# Altium PCB ControleEsp32.PcbDoc
Units mil, origin at the board's own origin, x right, y up, seen from the top; angles counter-clockwise.
Board outline 3745 x 1435 mil, 2 copper layers (Top Layer, Bottom Layer); 46 components, 37 nets, 158 pads, 23 vias.
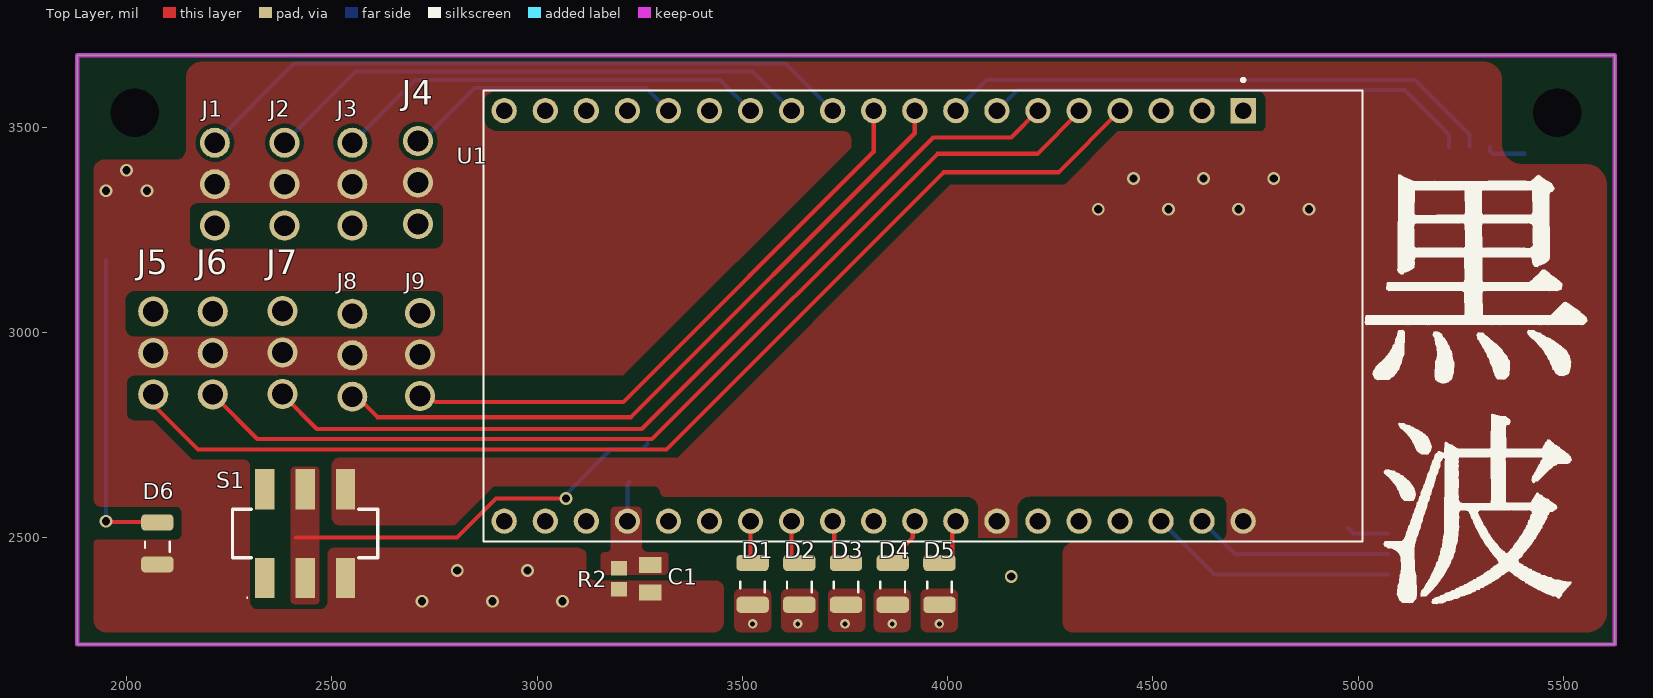
[diagram p0: Top Layer view]
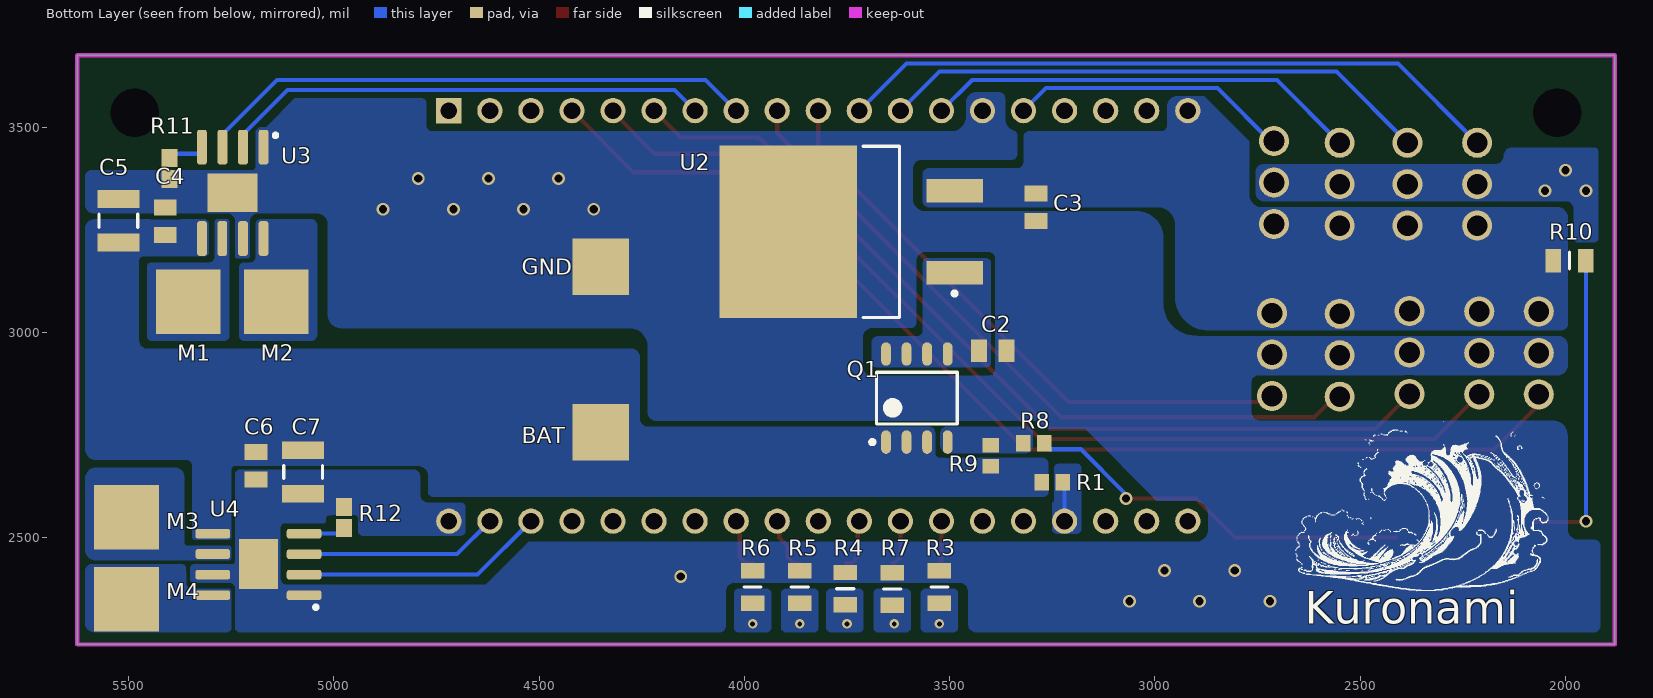
[diagram p1: Bottom Layer view, seen from below]
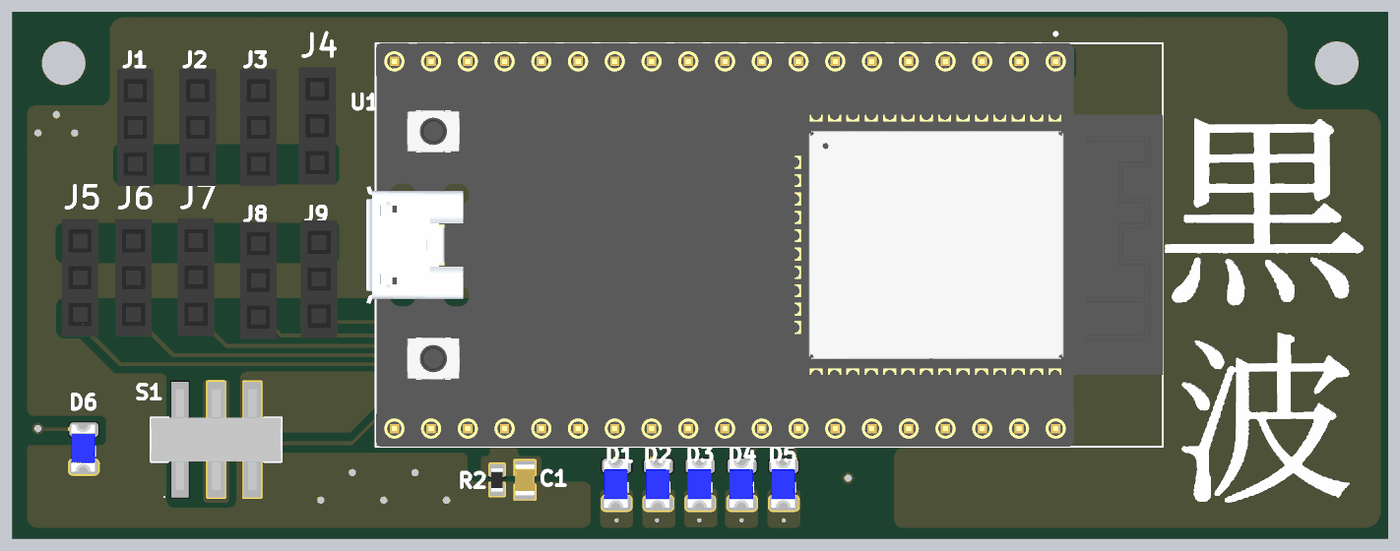
[diagram p2: 3D render of the assembled board from above, using the file's embedded part models]
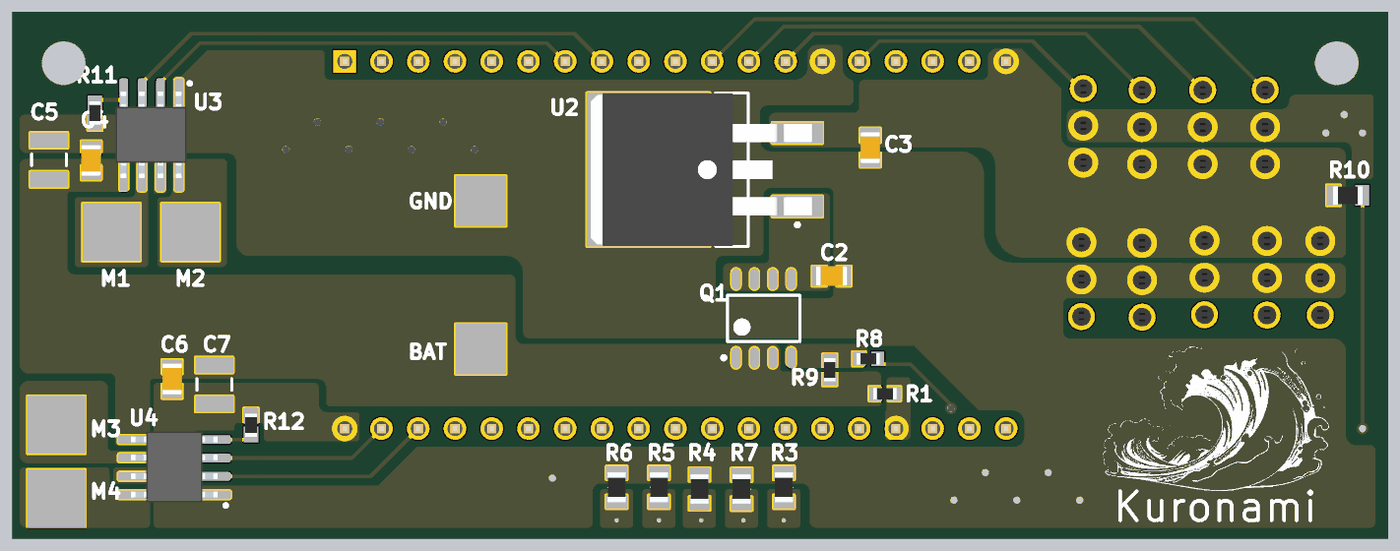
[diagram p3: 3D render of the assembled board from below, using the file's embedded part models]

## Layer stack, top to bottom
Top Solder: solder mask 0.4, Solder Resist, Dk 3.5
Top Layer: signal copper 1.4
Dielectric 1: dielectric 12.6, FR-4, Dk 4.8
Bottom Layer: signal copper 1.4
Bottom Solder: solder mask 0.4, Solder Resist, Dk 3.5

## Board outline
1880,2240 5625,2240 5625,3675 1880,3675

## Design rules (kind name [scope] priority, off if disabled: settings)
Clearance [All] p1: gap=10 ignorepadtopadclearanceinfootprint=FALSE except(0: Arc-Hole Track-Hole SMDPad-Hole THPad-Hole Via-Hole Fill-Hole Poly-Hole Region-Hole Text-Hole; 3.94: Arc-Arc Arc-Track Arc-SMDPad Track-Track Track-SMDPad SMDPad-SMDPad)
PolygonConnect [All] p1: connectstyle=Direct reliefconductorwidth=10 reliefentries=4 polygonreliefangle="90 Angle" airgapwidth=10
RoutingVias [All] p1: holewidth=28 width=50 viastyle="Through Hole" minholewidth=28 minwidth=50 maxholewidth=28 maxwidth=50
SolderMaskExpansion [All] p1: expansion=4 istentingtop=FALSE
Width [All] p1: maxlimit=10 minlimit=10 preferedwidth=10
30 further rules are at their usual default settings.

## Classes and differential pairs
component class Fonteslineares: BAT C2 C3 D6 GND Q1 R8 R9 R10 S1 U2
component class Driver2: C6 C7 M3 M4 R12 U4
component class Driver1: C4 C5 M1 M2 R11 U3
component class controleEsp32: C1 D1 D2 D3 D4 D5 J1 J2 J3 J4 J5 J6 J7 J8 J9 R1 R2 R3 R4 R5 R6 R7 U1

## Components (designator, comment, footprint, x,y, rotation, side; value= is the part's Value field where it differs from the comment)
BAT "Source Pad" PAD_ALIMENTAÇÃO_MINI 4350,2756.57 r180 bottom
C1 "100 nF" C0805 3275,2400 r90 top
C2 "0.33 uF" C0805 3395,2955 r0 bottom
C3 "0.1uF" C0805 3290,3305 r90 bottom
C4 "0.1uF" C0805 5410,3270.34 r270 bottom
C5 "47uF" C1210 5525,3271.85 r270 bottom
C6 "0.1uF" C0805 5190,2675 r90 bottom
C7 "47uF" C1210 5075,2660 r90 bottom
D1 "Blue" DIODO_2-SMD-3215 3525,2387.19 r90 top
D2 "Blue" DIODO_2-SMD-3215 3638.75,2387.19 r90 top
D3 "Blue" DIODO_2-SMD-3215 3752.5,2387.19 r90 top
D4 "Blue" DIODO_2-SMD-3215 3866.25,2387.19 r90 top
D5 "Blue" DIODO_2-SMD-3215 3980,2387.19 r90 top
D6 "Blue" DIODO_2-SMD-3215 2074.94,2485.71 r90 top
GND "Ground Pad" PAD_ALIMENTAÇÃO_MINI 4350,3160 r180 bottom
J1 "Female Header 3" "FEMALE HEADER 3" 2215,3260 r90 top
J2 "Female Header 3" "FEMALE HEADER 3" 2385,3260 r90 top
J3 "Female Header 3" "FEMALE HEADER 3" 2550,3260 r90 top
J4 "Female Header 3" "FEMALE HEADER 3" 2710,3264.02 r90 top
J5 "Female Header 3" "FEMALE HEADER 3" 2065,3050.98 r270 top
J6 "Female Header 3" "FEMALE HEADER 3" 2210,3050.98 r270 top
J7 "Female Header 3" "FEMALE HEADER 3" 2380,3051.97 r270 top
J8 "Female Header 3" "FEMALE HEADER 3" 2550,2843.34 r90 top
J9 "Female Header 3" "FEMALE HEADER 3" 2715,3046.97 r270 top
M1 "Motor Pad" PAD_MOTOR_MINI 5355,3075 r0 top
M2 "Motor Pad" PAD_MOTOR_MINI 5140,3075 r0 top
M3 "Motor Pad" PAD_MOTOR_MINI 5505,2550 r0 top
M4 "Motor Pad" PAD_MOTOR_MINI 5505,2350 r0 top
Q1 "FDS6576" SOIC-8 3580,2840 r90 bottom
R1 "10kR" RESISTOR_0603 3250,2635 r0 bottom
R2 "3.3kR" RESISTOR_0603 3199.81,2400 r90 top
R3 "1.5 kR" RESISTOR_0805 3525,2380 r90 bottom
R4 "1.5 kR" RESISTOR_0805 3754.39,2375.61 r90 bottom
R5 "1.5 kR" RESISTOR_0805 3865,2380 r90 bottom
R6 "1.5 kR" RESISTOR_0805 3980,2380 r90 bottom
R7 "1.5 kR" RESISTOR_0805 3640,2375 r90 bottom
R8 "10kR" RESISTOR_0603 3295,2730 r0 bottom
R9 "10kR" RESISTOR_0603 3400,2700 r90 bottom
R10 "750R" RESISTOR_0805 1990,3175 r0 bottom
R11 "30kOhms" RESC1608X55N 5400,3399.41 r270 bottom
R12 "30kOhms" RESC1608X55N 4975,2549.41 r90 bottom
S1 "JS202011SCQN" DPDT 2435,2510 r0 top
U1 "ESP32-DEVKITC-32D" MODULE_ESP32-DEVKITC-32D 3942.05,3040 r270 top
U2 "L7805CD2T-TR" D2PAK 3740,3245 r0 bottom
U3 "DRV8871DDA" SO-PowerPad-8(8_pins) 5247.08,3340 r270 bottom
U4 "DRV8871DDA" SO-PowerPad-8(8_pins) 5183.78,2435.59 r0 bottom

## Footprints (in the part's own frame and the unit in brackets; to place one, negate y for a bottom-side part, rotate by r counter-clockwise, add the part's x,y. Pads: shape width x height; smd on the part's side, far side on the other; paste and mask are expansions set on the pad)
C0805 [mm]
  rect 1x1.4 smd: 1(-0.85,-0.008) 2(0.85,-0.008)
  body extent -1.07,-0.68 1.07,0.67, height 0.9
C1210 [mm] "Chip Capacitor, Body 3.2x2.5mm, IPC High Density"
  rect 1.1x2.6 smd: 1(-1.35,0) 2(1.35,0)
  silkscreen extent -0.4,-1.2 0.4,1.2, body extent -1.7,-1.35 1.7,1.35, height 1.3
D2PAK [mm] "D2-PAK, 3-Pads, Body 7,60x8,64mm (max), IPC Medium Density"
  rect 3.5x1.45 smd: 1(-6.4,2.54) 3(-6.4,-2.54)
  rect 8.5x10.65 smd: 2(3.9,0)
  silkscreen extent -6.52,-5.3 -0.75,5.3, body extent -7.41,-5.28 7.89,5.28, height 4.81
DIODO_2-SMD-3215 [mm]
  rrect50% 1x2 smd: A(1.3,0) C(-1.288,-0.001)
  silkscreen extent -0.51,-0.76 0.13,0.76, body extent -1.61,-0.77 1.66,0.87, height 0.9
DPDT [mm]
  rect 1.2x2.5 smd: A1(0,-2.75) A1(0,2.75) A2(-2.5,-2.75) A2(-2.5,2.75) A3(2.5,-2.75) A3(2.5,2.75)
  silkscreen extent -4.5,-4 4.5,1.5, body extent -4.5,-3.5 4.5,3.5, height 5.65
"FEMALE HEADER 3" [mm]
  round 1.86 hole 1.28: PIN1(0,0) PIN2(2.565,0) PIN3(5.13,0)
  body extent -1.52,-1.27 6.6,1.27, height 8.5
MODULE_ESP32-DEVKITC-32D [mm]
  rect 1.56x1.56 / inner round 1.56 / far side rect 1.56x1.56 hole 1.04: J2-1(-12.7,19.76)
  round 1.56 hole 1.04: J2-2(-12.7,17.22) J2-3(-12.7,14.68) J2-4(-12.7,12.14) J2-5(-12.7,9.6) J2-6(-12.7,7.06) J2-7(-12.7,4.52) J2-8(-12.7,1.98) J2-9(-12.7,-0.56) J2-10(-12.7,-3.1) J2-11(-12.7,-5.64) J2-12(-12.7,-8.18) J2-13(-12.7,-10.72) J2-14(-12.7,-13.26) J2-15(-12.7,-15.8) J2-16(-12.7,-18.34) J2-17(-12.7,-20.88) J2-18(-12.7,-23.42) J2-19(-12.7,-25.96) J3-1(12.7,19.76) J3-2(12.7,17.22) J3-3(12.7,14.68) J3-4(12.7,12.14) J3-5(12.7,9.6) J3-6(12.7,7.06) J3-7(12.7,4.52) J3-8(12.7,1.98) J3-9(12.7,-0.56) J3-10(12.7,-3.1) J3-11(12.7,-5.64) J3-12(12.7,-8.18) J3-13(12.7,-10.72) J3-14(12.7,-13.26) J3-15(12.7,-15.8) J3-16(12.7,-18.34) J3-17(12.7,-20.88) J3-18(12.7,-23.42) J3-19(12.7,-25.96)
  silkscreen extent -14.7,-27.25 13.95,27.15, body extent -13.97,-27.9 13.97,27.2, height 6.69
PAD_ALIMENTAÇÃO_MINI [mm]
  rect 3.5x3.5 smd: A(0,0)
PAD_MOTOR_MINI [mm]
  rect 4x4 smd far side: M(0,0)
RESC1608X55N [mm]
  rect 1.1x1 smd: 1(-0.65,0) 2(0.65,0)
  body extent -0.8,-0.4 0.8,0.4, height 0.55
RESISTOR_0603 [mm]
  rect 0.9x1 smd: 1(-0.65,0) 2(0.65,0)
  body extent -0.8,-0.4 0.8,0.4, height 0.55
RESISTOR_0805 [mm]
  rect 0.95x1.45 smd: 1(-1,0) 2(1,0)
  silkscreen extent 0,-0.53 0,0.53, body extent -1.02,-0.63 1.02,0.63, height 0.5
SO-PowerPad-8(8_pins) [mm]
  rrect50% 2.15x0.6 smd: 1(-2.825,1.925) 2(-2.825,0.655) 3(-2.825,-0.615) 4(-2.825,-1.885) 5(2.825,-1.885) 6(2.825,-0.625) 7(2.825,0.65) 8(2.825,1.925)
  rect 2.4x3.1 smd: 9(0,0)
  silkscreen extent -3.66,2.57 -3.45,2.77, body extent -3,-2.45 3,2.45, height 1.7
SOIC-8 [mm] "SOIC, 8-Leads, Body 4,90x3,90mm, Pitch 1,27mm, IPC Medium Density"
  oval 1.45x0.6 smd: D(2.725,-1.905) D(2.725,-0.635) D(2.725,0.635) D(2.725,1.905) G(-2.725,-1.905) S(-2.725,-0.635) S(-2.725,0.635) S(-2.725,1.905)
  silkscreen extent -2.85,-2.5 1.6,2.88, body extent -2,-2.5 2,2.5, height 1.75

## Part data
BAT: library part "Source Pad Mini Sumô", "VCC PAD MINI SUMÔ", Cable AWG="20 / 18 (AWG)", Library Ref=Pads, Recomended Category="Mini Sumô", Size="3.5 x 3.5 (mm)"
C1: library part 885012207128, "CAP CER 100 nF 100V X7R 0805", Manufacturer="Wurth Elektronik", Operating Temperature="-55°C ~125ºC", Package / Case="0805(2012 Metric)", Supplier Part Number 1=710-885012207128, Tolerance=10%, Voltage - Rated="100 VDC", Category="Ceramic capacitor", ComponentLink1Description=Datasheet, ComponentLink1URL=https://br.mouser.com/datasheet/2/445/885012207128-1727772.pdf, ComponentLink2Description="Mouser Link", ComponentLink2URL=https://br.mouser.com/ProductDetail/Wurth-Elektronik/885012207128?qs=MLItCLRbWsys1TnbPEYt%252BQ%3D%3D, Dieletric=X7R, ESR=-, Library Control - Checked Footprint=Yes, Library Control - Checked Schematic=Yes, Library Ref=Capacitor, Part Number=885012207128, Price="1=0,41 10=0,283 100=0,169 1000=0,107 (USD)", Size / Dimension="2 mm L  x 1.25 mm W x 1.25 mm H", Supplier 1=Mouser
C2: library part GCM21BR71E334KA37K, "CAP CER 0.33UF 25V X7R 0805", Manufacturer="Murata Eletronics", Operating Temperature="-55 C ~ 125 C", Package / Case="0805 (2012 Metric)", Supplier Part Number 1=81-GCM21BR71E334KA7K, Tolerance=10%, Voltage - Rated="25 VDC", Category="Ceramic Capacitor", ComponentLink1Description=Datasheet, ComponentLink1URL=https://br.mouser.com/datasheet/2/281/GCM21BR71E334KA37_01-1968656.pdf, ComponentLink2Description="Mouser Link", ComponentLink2URL=https://br.mouser.com/ProductDetail/Murata-Electronics/GCM21BR71E334KA37K?qs=N3Kl9KD794Tg%2FXM5q2uFQQ%3D%3D, ComponentLink3Description=ESR, ComponentLink3URL=https://www.murata.com/en-us/products/productdetail?partno=GCM21BR71E334KA37%23, Dieletric=X7R, Library Control - Checked Footprint=Yes, Library Control - Checked Schematic=Yes, Library Control - Last Update="28/06/2021 00:57", Library Control - Person that Checked Footprint=Nikaum, Library Control - Person that Checked Schematic=Nikaum, Library Control - Person that did the Last Update Footprint=Nikaum, Library Control - Person that did the Last Update Schematic=Nikaum, Library Ref=Capacitor, Part Number=GCM21BR71E334KA37K, Price="1= 0,57, 10= 0,398, 100= 0,239 (USD)", Size / Dimension="2,00 L x 1,25 W x 1,25 H", Supplier 1=Mouser
C3: library part C0805C104M3RACTU, "CAP CER 0.1uF 25V X7R 0805", Manufacturer=Kemet, Operating Temperature="-55 C ~ 125 C", Package / Case="0805(2012 mestric)", Supplier Part Number 1=80-C0805C104M3R, Tolerance=20%, Voltage - Rated="25 VDC", Category="Ceramic Capacitor", ComponentLink1Description=Datasheet, ComponentLink1URL=https://br.mouser.com/datasheet/2/212/KEM_C1002_X7R_SMD-1102033.pdf, ComponentLink2Description="Mouser Link", ComponentLink2URL=https://br.mouser.com/ProductDetail/KEMET/C0805C104M3RACTU?qs=jbCUrP3sAgSIdMuvv9W4Pg%3D%3D, Dieletric=X7R, ESR=-, Library Control - Checked Footprint=No, Library Control - Checked Schematic=Yes, Library Control - Last Update="26/06/2021 20:52", Library Control - Person that Checked Schematic=Guilherme, Library Control - Person that did the Last Update Schematic=Marcos, Library Ref=Capacitor, Part Number=C0805C104M3RACTU, Price="1=0,13 10=0,064 100=0,037 1000=0,025 (USD)", Size / Dimension="1.25 mm W x 2 mm L x 0.78 mm H", Supplier 1=Mouser
C4 C6: library part C0805C104M3RACTU, "CAP CER 100nF 25V X7R 0805", Manufacturer=Kemet, Operating Temperature="-55 C ~ 125 C", Package / Case="0805(2012 mestric)", Supplier Part Number 1=80-C0805C104M3R, Tolerance=20%, Voltage - Rated="25 VDC", Category="Ceramic Capacitor", ComponentLink1Description=Datasheet, ComponentLink1URL=https://br.mouser.com/datasheet/2/212/KEM_C1002_X7R_SMD-1102033.pdf, ComponentLink2Description="Mouser Link", ComponentLink2URL=https://br.mouser.com/ProductDetail/KEMET/C0805C104M3RACTU?qs=jbCUrP3sAgSIdMuvv9W4Pg%3D%3D, Dieletric=X7R, ESR=-, Library Control - Checked Footprint=Yes, Library Control - Checked Schematic=Yes, Library Control - Last Update=25/08/22, Library Control - Person that Checked Footprint=Cage, Library Control - Person that Checked Schematic=Cage, Library Control - Person that did the Last Update Footprint=Cage, Library Control - Person that did the Last Update Schematic=Cage, Library Ref=Capacitor, Part Number=C0805C104M3RACTU, Price="1=0,13 10=0,064 100=0,037 1000=0,025 (USD)", Size / Dimension="1.25 mm W x 2 mm L x 0.78 mm H", Supplier 1=Mouser
C5 C7: library part GRM32EC81C476KE15K, "CAP CER 47uF 16V X6S 1210", Manufacturer=Murata, Operating Temperature="-55°C ~ 105°C", Package / Case="1210 (3225 metric)", Supplier Part Number 1=81-GRM32EC81C476KE5K, Tolerance=10%, Voltage - Rated=16V, Category="Ceramic Capacitor", ComponentLink1Description=Datasheet, ComponentLink1URL=https://br.mouser.com/datasheet/2/281/1/GRM32EC81C476KE15_01A-1988154.pdf, ComponentLink2Description="Mouser Link", ComponentLink2URL=https://br.mouser.com/ProductDetail/Murata-Electronics/GRM32EC81C476KE15K?qs=pba5EUA0Y0ZfNhWUOosFbg%3D%3D, Dieletric=X6S, ESR=-, Library Control - Checked Footprint=Yes, Library Control - Checked Schematic=Yes, Library Control - Last Update=22/08/22, Library Control - Person that Checked Footprint=Cage, Library Control - Person that Checked Schematic=Cage, Library Control - Person that did the Last Update Footprint=Prisma, Library Control - Person that did the Last Update Schematic=Prisma, Library Ref=Capacitor, Part Number=GRM32EC81C476KE15K, Price="1=0,59 10=0,314 100=0,274 (USD)", Size / Dimension="3.2mm x 2.5mm x 2.5mm", Supplier 1=Mouser
D1 D2 D3 D4 D5 D6: library part EAST3215BA5, "LED 75mW BLUE 45MCD 3215", Current - Forward (If)="20 mA", Manufacturer="Everlight Electronics", Max Power Dissipation="75 mW", Operating Temperature="- 40 °C ~ 85 °C", Package / Case=3215, Reverse Voltage="5 V", Supplier Part Number 1=638-EAST3215BA5, Voltage - Forward (Vf)="3,30 V", Category="Standard LEDs - SMD", Color=Blue, ComponentLink1Description="Mouser Link", ComponentLink1URL=https://www.mouser.com/ProductDetail/Everlight/EAST3215BA5?qs=Cqqh%252BS766wnzp9nQVj5A4g==, ComponentLink2Description=Datasheet, ComponentLink2URL=https://www.mouser.com/datasheet/2/143/EAST3215BA5-1154292.pdf, Library Control - Checked Footprint=yes, Library Control - Checked Schematic=yes, Library Control - Last Update="13/06/2021 12:45", Library Control - Person that Checked Footprint=Lucas, Library Control - Person that Checked Schematic=Lucas, Library Control - Person that did the Last Update Footprint="Stéfany (Ster)", Library Control - Person that did the Last Update Schematic="Stéfany (Ster)", Library Ref=Diodo/Led, Luminous Intensity="45 mcd", Max Current Rating="20 mA", Part Number=EAST3215BA5, Price="1 = 0,3800, 10 = 0,2050, 100 = 0.1080 (USD)", Supplier 1=Mouser, Viewing Angle=130°, Wavelength="468 nm"
GND: library part "Ground Pad Mini Sumô", "GND PAD MINI SUMÔ", Cable AWG="20 / 18 (AWG)", Library Ref=Pads, Recomended Category="Mini Sumô", Size="3.5 x 3.5 (mm)"
M1 M2 M3 M4: library part "Motor Pad Mini Sumô", "MOTOR PAD MINI SUMÔ", Cable AWG="20 / 18 (AWG)", Library Ref=Pads, Recomended Category="Mini Sumô", Size="3.5 x 3.5 (mm)"
Q1: "MOSFET P-CH 20V 11A SOIC-8", Current - Continuous Drain (Id) @25°C=-11A, Drain to Source Voltage (Vds)=-20V, Drive Voltage (Max Rds On, Min Rds On)="-2.5V ~4.5V", Input Capacitance (Ciss) (Max) @Vds=4044pF@-10V, Manufacturer="onsemi / Fairchild", Operating Temperature="-55 °C ~150 °C", Package / Case=SOIC-8, Power Dissipation (Max)=2.5W, Supplier Part Number 1=512-FDS6576, ComponentLink1Description=Datasheet, ComponentLink1URL=https://br.mouser.com/datasheet/2/308/1/FDS6576_D-1808687.pdf, ComponentLink2Description=Mouser, ComponentLink2URL=https://br.mouser.com/ProductDetail/onsemi-Fairchild/FDS6576?qs=FOlmdCx%252BAA1N14vq5QZP7Q%3D%3D, FET Type=P-Channel, Gate Charge (Qg) (Max) @ Vgs=60nC@-4.5V, Library Ref=Mosfet, Part Number=SOIC-8, Price="1=1.34, 10=1.20, 100=0.932, 500=0.77, 1000=0.608 (USD)", Rds On (Max) @ Id, Vgs="23mOhms @ -11A, -4.5V", Rise / Fall Time (Typ)="17 / 79 (ns)", Supplier 1=Mouser, Vgs (Max)=12V, Vgs(th) (Max) Id=-1.5V@-250uA
R1 R8 R9: library part RC0603JR-0710KL, "RES SMD 10K OHM 5% 1/10W 0603", Manufacturer=Yageo, Operating Temperature="- 55ºC ~ 155ºC", Package / Case="0603 (1608 Metric)", Power Rating="100 mW (1/10 W)", Resistor Type=Fixo, Supplier Part Number 1=603-RC0603JR-0710KL, Temperature Coefficient="100 PPM / C", Tolerance="5 %", Voltage Rating="75 V", Category="Thick Film Resistors - SMD", ComponentLink1Description="Mouser Link", ComponentLink1URL=https://br.mouser.com/ProductDetail/Yageo/RC0603JR-0710KL?qs=ksOUTF%2FWcd8D6T22BJkQ7g%3D%3D, ComponentLink2Description="Datsheet Link", ComponentLink2URL=https://br.mouser.com/datasheet/2/447/Yageo_03_18_2021_PYu_RC_Group_51_RoHS_L_11-2199992.pdf, Library Control - Checked Footprint=No, Library Control - Checked Schematic=Yes, Library Control - Last Update="21/06/21 14:15", Library Control - Person that Checked Schematic=Marcos, Library Control - Person that did the Last Update Footprint=Dalarme, Library Control - Person that did the Last Update Schematic=Marcos, Library Ref=Resistor, Part Number=RC0603JR-0710KL, Price="1=0,10, 10=0,015, 100=0,005 1000=0,0040 (USD)", Size / Dimension="1.6 mm L x  0.8 mm W x  0.45 mm H", Supplier 1=Mouser
R2: library part CRGCQ0603F3K3, "RES SMD 3.3K OHM 1% 1/10W 0603", Manufacturer="TE Connectivity / Holsworthy", Operating Temperature="- 55ºC ~ 125ºC", Package / Case="0603 (1608 Metric)", Power Rating="100 mW (1/10 W)", Resistor Type=Fixed, Supplier Part Number 1=279-CRGCQ0603F3K3, Temperature Coefficient="100 PPM / C", Tolerance="1 %", Voltage Rating="75 V", Category="Thick Film Resistors", ComponentLink1Description="Mouser Link", ComponentLink1URL=https://br.mouser.com/ProductDetail/TE-Connectivity-Holsworthy/CRGCQ0603F3K3?qs=sGAEpiMZZMvdGkrng054t7z4BkURc4Lz7mzhBruKq8fwVJ16OlxZFQ%3D%3D, ComponentLink2Description=Datasheet, ComponentLink2URL=https://br.mouser.com/datasheet/2/418/4/NG_DS_1773204-3_1-1358553.pdf, Library Control - Checked Footprint=Yes, Library Control - Checked Schematic=Yes, Library Control - Last Update="27/06/2021 20:27", Library Control - Person that Checked Footprint=Nikaum, Library Control - Person that Checked Schematic=Guilherme, Library Control - Person that did the Last Update Footprint=Dalarme, Library Control - Person that did the Last Update Schematic=Dalarme, Library Ref=Resistor, Part Number=CRGCQ0603F3K3, Price="1=0,10, 10=0,029, 100=0,011 (USD)", Size / Dimension="1.6 mm L x  0.8 mm W x  0.45 mm H", Supplier 1=Mouser
R3 R4 R5 R6 R7: library part CRCW08051K50FKEAC, "RES SMD 1.5K OHM 1% 1/8W 0805", Manufacturer="Vishay / Dale", Operating Temperature="-55 C ~ 155 C", Package / Case="0805 (2012 Metric)", Power Rating="125 mW (1/8 W)", Resistor Type=Fixo, Supplier Part Number 1=71-CRCW08051K50FKEAC, Temperature Coefficient="100 PPM / C", Tolerance="1 %", Voltage Rating="150 V", Category="Thick Film Resistors - SMD", ComponentLink1Description="Mouser Link", ComponentLink1URL=https://br.mouser.com/ProductDetail/Vishay-Dale/CRCW08051K50FKEAC?qs=E3Y5ESvWgWMwo6R2oqPQ9Q%3D%3D, ComponentLink2Description=Datasheet, ComponentLink2URL=https://br.mouser.com/datasheet/2/427/crcwce3-1762584.pdf, Library Control - Checked Footprint=Yes, Library Control - Checked Schematic=Yes, Library Control - Last Update="27/06/2021 20:45", Library Control - Person that Checked Footprint=Nikaum, Library Control - Person that Checked Schematic=Nikaum, Library Control - Person that did the Last Update Footprint=Nicolas, Library Control - Person that did the Last Update Schematic=Nikaum, Library Ref=Resistor, Part Number=CRCW08051K50FKEAC, Price="1=0,10, 10=0,059, 100=0,024 (USD)", Size / Dimension="2,00 L x 1,25 W x 0,45 H", Supplier 1=Mouser
R10: library part ERJ-6GEYJ751V, "RES SMD 750 OHM 5% 1/8W 0805", Manufacturer=Panasonic, Operating Temperature="- 55ºC ~ 155ºC", Package / Case="0805 (2012 Metric)", Power Rating="125 mW (1/8 W)", Resistor Type=Fixed, Supplier Part Number 1=667-ERJ-6GEYJ751V, Temperature Coefficient="200 PPM / C", Tolerance="5 %", Voltage Rating="150 V", Category="Thick Film Resistors - SMD", ComponentLink1Description="Mouser Link", ComponentLink1URL=https://br.mouser.com/ProductDetail/Panasonic/ERJ-6GEYJ751V?qs=sGAEpiMZZMukHu%252BjC5l7YYjpZ9X9PhOCxoCk8Svj5Vk%3D, ComponentLink2Description=Datasheet, ComponentLink2URL=https://br.mouser.com/datasheet/2/315/AOA0000C301-1488782.pdf, Library Control - Checked Footprint=Yes, Library Control - Checked Schematic=Yes, Library Control - Last Update="27/06/2021 20:29", Library Control - Person that Checked Footprint=Nikaum, Library Control - Person that Checked Schematic=Guilherme, Library Control - Person that did the Last Update Footprint=Dalarme, Library Control - Person that did the Last Update Schematic=Nikaum, Library Ref=Resistor, Part Number=ERJ-6GEYJ751V, Price="1=0,10, 10=0,055, 100=0,021 (USD)", Size / Dimension="2 mm L x  1.25 mm W x  0.6 mm H", Supplier 1=Mouser
R11 R12: library part RC0603FR-0730KL, "RES SMD 30 kOHMS 1% 1/10W 0603", Manufacturer=YAGEO, Operating Temperature="- 55°C ~ 155°C", Package / Case="0603 (1608 Metric)", Power Rating="100 mW (1/10 W)", Resistor Type=Fixo, Supplier Part Number 1=603-RC0603FR-0730KL, Temperature Coefficient="100 PPM / C", Tolerance="1 %", Voltage Rating="50 V", Category="Thick Film Resistors - SMD", ComponentLink1Description="Mouser Link", ComponentLink1URL=https://br.mouser.com/ProductDetail/YAGEO/RC0603FR-0730KL?qs=diQw95jMAeNFr44yr782FQ%3D%3D, ComponentLink2Description=Datasheet, ComponentLink2URL=https://br.mouser.com/datasheet/2/447/Yageo_03_18_2021_PYu_RC_Group_51_RoHS_L_11-2199992.pdf, Library Control - Checked Footprint=Yes, Library Control - Checked Schematic=Yes, Library Control - Last Update="24/07/2021 11:34", Library Control - Person that Checked Footprint=Guilherme, Library Control - Person that Checked Schematic=Guilherme, Library Control - Person that did the Last Update Footprint=Guilherme, Library Control - Person that did the Last Update Schematic=Guilherme, Library Ref=Resistor, Part Number=RC0603FR-0730KL, Price="1=0,10, 10=0,024, 100=0,01(USD)", Size / Dimension="1,6 L x 0,8 W x 0,45 H", Supplier 1=Mouser
S1: "DEEP SWITCH 4 POSITIONS", Current Rating="300 mA", Manufacturer=C&K, Mouser Part Number=611-JS202011SCQN, Operating Temperature(max - min)=-20~70°C, Voltage Rating DC="30 VDC", ComponentLink1Description="Mouser Link", ComponentLink1URL=https://br.mouser.com/ProductDetail/CK/JS202011SCQN?qs=LgMIjt8LuD95JYWxZ7NvZA%3D%3D, ComponentLink2Description="Datasheet Link", ComponentLink2URL=https://www.mouser.com/datasheet/2/60/js-1841892.pdf, Library Control - Checked Footprint=Yes, Library Control - Checked Schematic=Yes, Library Control - Last Update=15/06/2021, Library Control - Person that Checked Footprint=Nikaum, Library Control - Person that Checked Schematic=Nikaum, Library Control - Person that did the Last Update Footprint=Nikaum, Library Control - Person that did the Last Update Schematic=Nikaum, Library Ref=Diversos, Part Number=JS202011SCQN, Supplier=Mouser, Switch Function="ON - ON"
U1: library part CMP-041-000000-1, "WiFi Development Tools (802.11) ESP32 General Development Kit, ESP32-WROOM-32D on the board", Package=None, Check_prices=https://www.snapeda.com/parts/ESP32-DEVKITC-32D/Espressif+Systems/view-part/?ref=eda, Component Type=Standard, Design Item ID=ESP32-DEVKITC-32D, MF="Espressif Systems", MP=ESP32-DEVKITC-32D, Pin Count=38, SnapEDA_Link=https://www.snapeda.com/parts/ESP32-DEVKITC-32D/Espressif+Systems/view-part/?ref=snap, Source=ESP32-DEVKITC-32D.SchLib
U2: "IC REG LINEAR 5V 1A D2PAK", Current - Output=1A, Current - Quiescent (Iq)=8mA, Manufacturer=ST, Max Power Dissipation="Internally Limited", Operating Temperature="-40~125 ºC", Package/ Case=D2PAK, Supplier Part Number 1=511-L7805CD2T-TR, Voltage - Dropout (Max)=2V, Voltage - Input (Max)=35V, Voltage - Output (Max)=5.25V, Voltage - Output (Min/Fixed)=5V, Category="Linear Voltage Regulator", ComponentLink1Description="Mouser Link", ComponentLink1URL=https://br.mouser.com/ProductDetail/STMicroelectronics/L7805CD2T-TR?qs=%2Fha2pyFadujE9KQ1BxQHaLKqcK8XYkwQA8UfL%2FIGb8dfQq%2Fq%2FT%2Fjqg%3D%3D, ComponentLink2Description=Datasheet, ComponentLink2URL=https://br.mouser.com/datasheet/2/389/cd00000444-1795274.pdf, Library Control - Checked Footprint=Yes, Library Control - Checked Schematic=Yes, Library Control - Last Update=25/06/21, Library Control - Person that Checked Footprint=Nícolas, Library Control - Person that Checked Schematic=Nícolas, Library Control - Person that did the Last Update Schematic=Nícolas, Library Ref="Voltage Regulator", Number of Regulators=1, Output Type=Fixed, Part Number=L7805CD2T-TR, Power Dissipation="Internally Limited", Price="1=0,93, 10=0,83, 100=0,79 (USD)", Supplier 1=Mouser
U3 U4: "IC MTR DRV (6.5V ~ 45V) (3.5 A) SO-PowerPad-8", Current - Output=3.5A, Current - Peak Output (Source, Sink)="3.6A / 3.6A", Logic Voltage - VIL, VIH="VIL=0.5V / VIH=1.5V", Manufacturer="Texas Instruments", Operating Supply Current=3mA, Operating Temperature="-40°C ~ 125°C", Package / Case=SO-PowerPad-8, Power Dissipation="Irms^2 (HighSide Rds(On) + LowSide Rds(On))", Rds On - Drain-Source Resistance="565m ohm", Suplier Part Number 1=595-DRV8871DDA, Voltage - Load="(6.5V ~ 45V)", Category=Driver, ComponentLink1Description="Mouser Link / ST Link", ComponentLink1URL=https://br.mouser.com/ProductDetail/Texas-Instruments/DRV8871DDA?qs=Fobv33ltQGiluwfB07aSBw%3D%3D, ComponentLink2Description=Datasheet, ComponentLink2URL=https://www.ti.com/lit/ds/symlink/drv8871.pdf?HQS=dis-mous-null-mousermode-dsf-pf-null-wwe&ts=1623013148488&ref_url=https%253A%252F%252Fwww.google.com%252F, Library Control - Checked Footprint=Yes, Library Control - Checked Schematic=Yes, Library Control - Last Update="12/06/2021 17:04", Library Control - Person that Checked Footprint="Stéfany (Ster)", Library Control - Person that Checked Schematic="Stéfany (Ster)", Library Control - Person that did the Last Update Footprint="Maria Laura", Library Control - Person that did the Last Update Schematic="Stéfany (Ster)", Library Ref=Driver, Logic (IN-SD/High Low)=IN-SD, Output Configuration="Half Bridge (2)", Part Number=DRV8871DDA, Price="1=3,15000, 10=2,84000, 100=2,31000 (USD)", Supplier 1=Mouser, Technology="Power MOSFET", Voltage - Supply="(6.5V ~ 45V)"
J1 J2 J3 J4 J5 J6 J7 J8 J9: Library Ref=Header, Number of Contacts=3, System=Connector

## Free pads (board coordinates)
  round 60 hole 118.11: MH(2020,3535) MH(5485,3535)

## Via types
v1: diameter 31.5, hole 19.68, Top Layer to Bottom Layer, tented both sides, 18 vias
v2: diameter 23.62, hole 11.81, Top Layer to Bottom Layer, tented both sides, 5 vias

## Nets (pads, with @x,y where several pads share a name; then routed paths per layer and width w, separated by ;. In a path a pad name is that pad's centre, name@x,y a point inside that pad or via, vN(x,y) a via of type N, cw(c..) or ccw(c..) an arc to the next point about the centre after c; other vN are vias at no path point)
1ILIM: R11.1 U3.4 | length 96
  Bottom Layer w10: U3.4 5321.29,3441.74 5328.03,3435 R11.1@5405.03,3435
2ILIM: R12.1 U4.4 | length 103.4
  Bottom Layer w10: R12.1 4989.02,2509.8 U4.4
5V: C3.2 J1.PIN1 J2.PIN1 J3.PIN1 J4.PIN1 J5.PIN1 J6.PIN1 J7.PIN1 J8.PIN3 J9.PIN1 R10.2 U1.J2-19 U2.3
BAT: BAT.A C4.2 C5.2 C6.2 C7.2 Q1.S R1.2 R9.1 U3.5 U4.5
DIST1: J3.PIN3 U1.J2-13 | length 1064.5
  Bottom Layer w10: J3.PIN3 2703.03,3615 3445,3615 U1.J2-13
DIST2: J4.PIN3 U1.J2-15 | length 682.9
  Bottom Layer w10: J4.PIN3@2715,3461.97 2848.03,3595 3265,3595 U1.J2-15
DIST3: J5.PIN3 U1.J2-4 | length 2770.2
  Top Layer w10: J5.PIN3@2045,2844.02 2174.02,2715 3315,2715 3990,3390 4270,3390 U1.J2-4
DIST4: J6.PIN3 U1.J2-5 | length 2481.3
  Top Layer w10: J6.PIN3@2215,2843.35 2318.35,2740 3280,2740 3975,3435 4218.64,3435 4320,3536.36 U1.J2-5
DIST5: J7.PIN3 U1.J2-6 | length 2188.5
  Top Layer w10: J7.PIN3@2385,2843.35 2463.35,2765 3255,2765 3965,3475 4155,3475 U1.J2-6
FLAGSIGNAL: J8.PIN1 U1.J2-9 | length 1732.2
  Top Layer w10: J8.PIN1 2561.66,2843.34 2611.61,2793.39 3228.39,2793.39 3920,3485 U1.J2-9
GND: C1.1 C2.1 C3.1 C4.1 C5.1 C6.1 C7.1 D6.C GND.A J1.PIN2 J2.PIN2 J3.PIN2 J4.PIN2 J5.PIN2 J6.PIN2 J7.PIN2 J8.PIN2 J9.PIN2 R2.1 R3.2 R4.2 R5.2 R6.2 R7.2 R11.2 R12.2 S1.A3 U1.J2-14 U1.J3-1 U1.J3-7 U2.2 U3.1 U3.7 U3.9 U4.1 U4.7 U4.9
  other v1: 2720,2345 2891,2345 3062,2345 4155,2405 2805.5,2420 2976.5,2420 4367,3300 4538,3300 4709,3300 4880,3300 1950,3345 2050,3345 4452.5,3375 4623.5,3375 4794.5,3375 2000,3395
LED1: D1.A U1.J3-13 | length 103.7
  Top Layer w10: U1.J3-13 3520,2443.38 D1.A
LED2: D2.A U1.J3-12 | length 112
  Top Layer w10: U1.J3-12 3620,2452.69 3634.32,2438.38 D2.A
LED3: D3.A U1.J3-11 | length 123.4
  Top Layer w10: U1.J3-11 3723.99,2536.01 3723.99,2452.69 3738.3,2438.38 D3.A
LED4: D4.A U1.J3-9 | length 132.3
  Top Layer w10: D4.A 3880.68,2438.38 3895,2452.69 3895,2480 3915.18,2500.18 3915.18,2535.18 U1.J3-9
LED5: D5.A U1.J3-8 | length 128.2
  Top Layer w10: D5.A 3997.06,2438.38 4011.38,2452.69 4011.38,2531.38 U1.J3-8
M1DIR: U1.J2-7 U3.2 | length 1197.4
  Bottom Layer w10: U1.J2-7 4170,3590 5113.02,3590 5221.29,3481.73 U3.2
M1OUT1: M1.M U3.6
M1OUT2: M2.M U3.8
M1PWM: U1.J2-8 U3.3 | length 1368.1
  Bottom Layer w10: U1.J2-8 4095,3615 5138.02,3615 5271.29,3481.73 U3.3
M2DIR: U1.J3-3 U4.2 | length 606.5
  Bottom Layer w10: U1.J3-3 4650.2,2409.8 U4.2
M2OUT1: M3.M U4.6
M2OUT2: M4.M U4.8
M2PWM: U1.J3-2 U4.3 | length 485.8
  Bottom Layer w10: U1.J3-2 4700.2,2459.8 U4.3
MedidorBateria: C1.2 R1.1 R2.2 U1.J3-16 | length 96.8
  Bottom Layer w10: U1.J3-16 3220,2630.59 R1.1
NetC2_2: C2.2 Q1.D U2.1
NetD1_C: D1.C R3.1
  other v2: 3525,2290
NetD2_C: D2.C R7.1
  other v2: 3635,2290
NetD3_C: D3.C R4.1
  other v2: 3750,2290
NetD4_C: D4.C R5.1
  other v2: 3865,2290
NetD5_C: D5.C R6.1
  other v2: 3980,2290
NetD6_A: D6.A R10.1 | length 761.5
  Top Layer w10: v1(1950,2540) 1951.56,2538.44 2073.39,2538.44 D6.A
  Bottom Layer w10: v1(1950,2540) 1950,3174.37 R10.1
NetQ1_G: Q1.G R8.2 R9.2
NetR8_1: R8.1 S1.A1 | length 959.3
  Top Layer w10: 2412.35,2500 2805,2500 2900,2595 v1(3070,2595)
  Bottom Layer w10: v1(3070,2595) 3074.11,2599.11 3074.11,2609.11 3180.31,2715.31 3256.69,2715.31 3269.41,2728.03 R8.1
SEN1: J1.PIN3 U1.J2-11 | length 1632.6
  Bottom Layer w10: J1.PIN3 2408.03,3655 3605,3655 U1.J2-11
SEN2: J2.PIN3 U1.J2-12 | length 1346
  Bottom Layer w10: J2.PIN3 2558.03,3635 3525,3635 U1.J2-12
START: J9.PIN3 U1.J2-10 | length 1463.9
  Top Layer w10: J9.PIN3 2727.1,2832.9 2749.57,2832.9 2752.47,2830 3210,2830 3820,3440 U1.J2-10
pads on no net: S1.A2 U1.J2-1 U1.J2-2 U1.J2-3 U1.J2-16 U1.J2-17 U1.J2-18 U1.J3-4 U1.J3-5 U1.J3-6 U1.J3-10 U1.J3-14 U1.J3-15 U1.J3-17 U1.J3-18 U1.J3-19

## Polygon pours and split planes (outlines as drawn)
MedidorBateria on Top Layer "MEDIDORBATERIA_L01_P103" (solid, pour order 103): 3190,2575 3245,2575 cw(c3245,2565) 3255,2565 3255,2480 ccw(c3270,2480) 3270,2465 3310,2465 cw(c3310,2455) 3320,2455 3320,2420 cw(c3310,2420) 3310,2410 3165,2410 cw(c3165,2420) 3155,2420 3155,2455 cw(c3165,2455) 3165,2465 3170,2465 ccw(c3170,2475) 3180,2475 3180,2565 cw(c3190,2565)
GND on Top Layer "Top Layer-GND" (solid, pour order 102): 4304.99,2270 5560,2270 ccw(c5560,2315) 5605,2315 5605,3360 ccw(c5555,3360) 5555,3410 5400,3410 cw(c5400,3460) 5350,3460 5350,3615 ccw(c5305,3615) 5305,3660 2185,3660 ccw(c2184.99,3620.01) 2145,3620.01 2145,3445 cw(c2120.02,3444.98) 2120,3420 1945,3420 ccw(c1944.98,3395.01) 1920,3395.01 1920,2595 ccw(c1940,2595) 1940,2575 2120,2575 cw(c2120.01,2560.01) 2135,2560 2135,2510 cw(c2120.02,2509.98) 2120,2495 1930,2495 ccw(c1929.98,2485.02) 1920,2485.02 1920,2300 ccw(c1950,2300) 1950,2270 3430,2270 ccw(c3430,2295) 3455,2295 3455,2375 ccw(c3435,2375) 3435,2395 3145,2395 cw(c3145,2420) 3120,2420 3120,2455 ccw(c3100,2455) 3100,2475 2505,2475 ccw(c2504.98,2460.02) 2490,2460.02 2490,2345 cw(c2470,2345) 2470,2325 2320,2325 cw(c2319.99,2344.99) 2300,2344.99 2300,2675 ccw(c2285.01,2675.01) 2285,2690 2160,2690 2065,2785 2020,2785 cw(c2019.99,2804.99) 2000,2804.99 2000,2875 cw(c2020,2875) 2020,2895 3210,2895 3765,3450 3765,3470 ccw(c3745,3470) 3745,3490 2905,3490 cw(c2904.99,3524.99) 2870.6,3518.52 ccw(c178.47,3551.39) 2870.75,3568.99 cw(c2911.3,3542.4) 2920.54,3590 4750,3590 cw(c4750.01,3565.01) 4775,3565 4775,3505 cw(c4760,3505) 4760,3490 4415,3490 4285,3360 4007.89,3360 ccw(c4007.84,3357.23) 4005.84,3359.15 3342.89,2695 2520,2695 ccw(c2519.97,2675.03) 2500,2675.03 2500,2550 ccw(c2520,2550) 2520,2530 2800,2530 2895,2625 3285,2625 cw(c3285.02,2610.02) 3300,2610 ccw(c3310,2610) 3310,2600 4045,2600 cw(c4045.02,2570.02) 4075,2570 4075,2565 4075,2520 cw(c4074.88,2519.98) 4075,2519.97 4075,2500 4170,2500 4170,2565.01 ccw(c4169.97,2565.03) 4170,2565.06 4170,2570 cw(c4200,2570) 4200,2600 4660,2600 cw(c4660.02,2580.02) 4680,2580 4680,2515 cw(c4655.03,2514.97) 4655,2490 4310,2490 ccw(c4309.97,2460.03) 4280,2460.02 4280,2294.99 ccw(c4304.99,2294.99)
NetR8_1 on Top Layer "NETR8_1_L01_P039" (solid, pour order 39): 2470,2347.5 2470,2662.5 ccw(c2460,2662.5) 2460,2672.5 2410,2672.5 ccw(c2410,2662.5) 2400,2662.5 2400,2347.5 ccw(c2410,2347.5) 2410,2337.5 2460,2337.5 ccw(c2460,2347.5)
NetD1_C on Top Layer "NETD1_C_L01_P000" (solid, pour order 0): 3495,2375 3555,2375 cw(c3555,2360) 3570,2360 3570,2285 cw(c3555,2285) 3555,2270 3495,2270 cw(c3495,2285) 3480,2285 3480,2360 cw(c3495,2360)
NetD2_C on Top Layer "NETD2_C_L01_P002" (solid, pour order 2): 3610,2375 3670,2375 cw(c3670,2360) 3685,2360 3685,2285 cw(c3670,2285) 3670,2270 3610,2270 cw(c3610,2285) 3595,2285 3595,2360 cw(c3610,2360)
NetD3_C on Top Layer "NETD3_C_L01_P003" (solid, pour order 3): 3724.39,2375.61 3784.39,2375.61 cw(c3784.39,2360.61) 3799.39,2360.61 3799.39,2285.61 cw(c3784.39,2285.61) 3784.39,2270.61 3724.39,2270.61 cw(c3724.39,2285.61) 3709.39,2285.61 3709.39,2360.61 cw(c3724.39,2360.61)
NetD4_C on Top Layer "NETD4_C_L01_P004" (solid, pour order 4): 3835,2375 3895,2375 cw(c3895,2360) 3910,2360 3910,2285 cw(c3895,2285) 3895,2270 3835,2270 cw(c3835,2285) 3820,2285 3820,2360 cw(c3835,2360)
NetD5_C on Top Layer "NETD5_C_L01_P005" (solid, pour order 5): 3950,2375 4010,2375 cw(c4010,2360) 4025,2360 4025,2285 cw(c4010,2285) 4010,2270 3950,2270 cw(c3950,2285) 3935,2285 3935,2360 cw(c3950,2360)
BAT on Bottom Layer "Bottom Layer-BAT" (solid, pour order 106): 4770,2650 cw(c4794.99,2650) 4795,2675 5240,2675 cw(c5240.01,2665.01) 5250,2665 5250,2500 ccw(c5255,2500) 5255,2495 5340,2495 ccw(c5340,2499.99) 5345,2500 5345,2675.01 cw(c5359.99,2675.01) 5360,2690 5580,2690 ccw(c5580,2715) 5605,2715 5605,3255 ccw(c5585,3255) 5585,3275 5315,3275 ccw(c5314.99,3265.01) 5305,3265.01 5305,3195 ccw(c5315,3195) 5315,3185 5465,3185 cw(c5465.01,3175.01) 5475,3175 5475,2980 cw(c5455.01,2979.99) 5455,2960 4275,2960 ccw(c4274.99,2940.01) 4255,2940.01 4255,2790 cw(c4235,2790) 4235,2770 3550,2770 ccw(c3549.99,2755.01) 3535,2755.01 3535,2705 cw(c3525,2705) 3525,2695 3275,2695 ccw(c3275,2680) 3260,2680 3260,2610 ccw(c3270,2610) 3270,2600 4175,2600 4260,2600 4760,2600 ccw(c4760,2610) 4770,2610 4770,2630
MedidorBateria on Bottom Layer "MEDIDORBATERIA_L02_P104" (solid, pour order 104): 3190,2510 3240,2510 ccw(c3240,2520) 3250,2520 3250,2585 ccw(c3245.74,2583.24) 3247.5,2587.5 ccw(c3243.24,2585.74) 3245,2590 3245,2670 ccw(c3235,2670) 3235,2680 3190,2680 ccw(c3190,2670) 3180,2670 3180,2520 ccw(c3190,2520)
GND on Bottom Layer "Bottom Layer-GND 1" (solid, pour order 67): 5604.99,3309.99 5605,3380 ccw(c5590,3380) 5590,3395 5475,3395 5350,3395 5200,3395 cw(c5199.99,3404.99) 5190,3405 5190,3495 5185,3500 5165,3500 5095,3570 4785,3570 ccw(c4784.98,3560.02) 4775,3560 4775,3505 cw(c4760.02,3504.98) 4760,3490 3495,3490 cw(c3494.99,3524.99) 3460,3525 3460,3560 ccw(c3435,3560) 3435,3585 3380,3585 ccw(c3379.98,3570.02) 3365,3570 3365,3520 cw(c3335.03,3519.98) 3344.73,3491.62 ccw(c3349.37,3478.02) 3335,3478 3335,3435 ccw(c3349.99,3434.99) 3350,3420 3570,3420 cw(c3570.01,3400.01) 3590,3400 3590,3325 cw(c3560.02,3324.98) 3560,3295 3375,3295 3045,3295 ccw(c3044.98,3230.02) 2980,3230 2980,3070.1 cw(c2901.96,3070.08) 2902.11,2992.03 2015.02,2990.04 ccw(c2015.05,2970) 1995,2969.98 1995,2920 ccw(c2019.99,2919.99) 2020,2895 2750,2895 cw(c2750.01,2880.01) 2765,2880 2765,2805 cw(c2745.02,2804.98) 2745,2785 2030,2785 ccw(c2029.98,2750.02) 1995,2750 1995,2520 cw(c1970.02,2519.98) 1970,2495 1930,2495 ccw(c1929.99,2480.01) 1915,2480 1915,2285 ccw(c1929.99,2284.99) 1930,2270 2870,2270 3435,2270 ccw(c3435,2290) 3455,2290 3455,2370 cw(c3475,2370) 3475,2390 4025,2390 cw(c4025.01,2370.01) 4045,2370 4045,2285 ccw(c4059.99,2284.99) 4060,2270 5230,2270 ccw(c5230,2280) 5240,2280 5240,2375 cw(c5255,2375) 5255,2390 5340,2390 ccw(c5340,2399.99) 5350,2400 5350,2425 ccw(c5340.02,2425.01) 5340,2435 5250,2435 cw(c5249.99,2444.99) 5240,2444.99 5240,2655 ccw(c5230.02,2655.01) 5230,2665 4805,2665 ccw(c4804.98,2650.02) 4790,2650.01 4790,2605 cw(c4770.02,2604.98) 4770,2585 4690,2585 ccw(c4689.97,2575.03) 4680,2575 4680,2514.99 ccw(c4689.98,2514.99) 4690,2505 4930,2505 ccw(c4930,2514.99) 4940,2515 4940,2545 cw(c4949.99,2545) 4950,2555 5010,2555 cw(c5010.01,2545.01) 5020,2545 5020,2540 ccw(c5025,2540) 5025,2535 5120,2535 cw(c5120.01,2525.01) 5130,2525 5130,2400 cw(c5115.02,2399.98) 5115,2385 4630,2385 4525,2490 2900,2490 cw(c2900,2520) 2870,2520 2870,2555 cw(c2904.99,2555) 2905,2590 2995,2590 3170,2765 3280,2765 3285,2770 3285,2775 cw(c3295,2775) 3295,2785 4215,2785 ccw(c4215,2805) 4235,2805 4235,2965 cw(c4280,2965) 4280,3010 4980,3010 ccw(c4980,3045) 5015,3045 5015,3265 cw(c5040,3265) 5040,3290 5185,3290 cw(c5185.01,3270.01) 5205,3270 5205,3185 ccw(c5209.99,3184.99) 5210,3180 5235,3180 ccw(c5235,3185) 5240,3185 5240,3270 cw(c5260,3270) 5260,3290 5585,3290 ccw(c5585,3309.99)
5V on Bottom Layer "Bottom Layer-5V" (solid, pour order 55): 1995,3020 ccw(c2009.99,3019.99) 2010,3005 2870,3005 ccw(c2870,3084.99) 2950,3085 2950,3260 cw(c2995,3260) 2995,3305 3550,3305 ccw(c3550,3320) 3565,3320 3565,3385 ccw(c3550,3385) 3550,3400 3335,3400 cw(c3335,3415) 3320,3415 3320,3475 ccw(c3305,3475) 3305,3490 2985,3490 cw(c2985,3505) 2970,3505 2970,3550 ccw(c2945,3550) 2945,3575 2880,3575 2770,3465 2770,3335 cw(c2740,3335) 2740,3305 2730,3305 2020,3305 ccw(c2019.99,3280.01) 1995,3280.01
GND on Bottom Layer "Bottom Layer-GND" (solid, pour order 71): 2735,3320 ccw(c2735,3340) 2755,3340 2755,3390 ccw(c2735,3390) 2735,3410 2170,3410 cw(c2170,3430) 2150,3430 ccw(c2130,3430) 2130,3450 1930,3450 ccw(c1930,3440) 1920,3440 1920,3230 ccw(c1930,3230) 1930,3220 1970,3220 ccw(c1970,3230) 1980,3230 1980,3300 cw(c2000,3300) 2000,3320
NetQ1_G on Bottom Layer "NETQ1_G_L02_P038" (solid, pour order 38): 3502.5,2705 3317.5,2705 cw(c3317.5,2725) 3297.5,2725 3297.5,2755 cw(c3312.5,2755) 3312.5,2770 3507.5,2770 cw(c3507.5,2755) 3522.5,2755 3522.5,2725 cw(c3502.5,2725)
NetC2_2 on Bottom Layer "NETC2_2_L02_P037" (solid, pour order 37): 3680,2915 3410,2915 cw(c3410,2925) 3400,2925 3400,3170 cw(c3410,3170) 3410,3180 3555,3180 cw(c3555,3170) 3565,3170 3565,3005 ccw(c3580,3005) 3580,2990 3675,2990 cw(c3675,2975) 3690,2975 3690,2925 cw(c3680,2925)
NetD1_C on Bottom Layer "NETD1_C_L02_P006" (solid, pour order 6): 3490,2375 3560,2375 cw(c3560,2365) 3570,2365 3570,2280 cw(c3560,2280) 3560,2270 3490,2270 cw(c3490,2280) 3480,2280 3480,2365 cw(c3490,2365)
NetD2_C on Bottom Layer "NETD2_C_L02_P007" (solid, pour order 7): 3605,2375 3675,2375 cw(c3675,2365) 3685,2365 3685,2280 cw(c3675,2280) 3675,2270 3605,2270 cw(c3605,2280) 3595,2280 3595,2365 cw(c3605,2365)
NetD3_C on Bottom Layer "NETD3_C_L02_P008" (solid, pour order 8): 3720,2375 3790,2375 cw(c3790,2365) 3800,2365 3800,2280 cw(c3790,2280) 3790,2270 3720,2270 cw(c3720,2280) 3710,2280 3710,2365 cw(c3720,2365)
NetD4_C on Bottom Layer "NETD4_C_L02_P009" (solid, pour order 9): 3830,2375 3900,2375 cw(c3900,2365) 3910,2365 3910,2280 cw(c3900,2280) 3900,2270 3830,2270 cw(c3830,2280) 3820,2280 3820,2365 cw(c3830,2365)
NetD5_C on Bottom Layer "NETD5_C_L02_P010" (solid, pour order 10): 3945,2375 4015,2375 cw(c4015,2365) 4025,2365 4025,2280 cw(c4015,2280) 4015,2270 3945,2270 cw(c3945,2280) 3935,2280 3935,2365 cw(c3945,2365)
M2OUT2 on Bottom Layer "M2OUT2_L02_P029" (solid, pour order 29): 5359.99,2389.99 5360,2425 cw(c5370,2425) 5370,2435 5590,2435 cw(c5590,2420) 5605,2420 5605,2290 cw(c5585,2290) 5585,2270 5260,2270 cw(c5260,2280) 5250,2280 5250,2370 cw(c5255,2370) 5255,2375 5345,2375 ccw(c5345,2389.99)
M2OUT1 on Bottom Layer "M2OUT1_L02_P028" (solid, pour order 28): 5605,2470 5605,2645 ccw(c5580,2645) 5580,2670 5385,2670 ccw(c5385,2650) 5365,2650 5365,2490 cw(c5355,2490) 5355,2480 5255,2480 ccw(c5255,2475) 5250,2475 5250,2450 ccw(c5255,2450) 5255,2445 5580,2445 ccw(c5580,2470)
M1OUT1 on Bottom Layer "M1OUT1_L02_P027" (solid, pour order 27): 5255,3270 5255,2990 ccw(c5265,2990) 5265,2980 5445,2980 ccw(c5445,2990) 5455,2990 5455,3160 ccw(c5445,3160) 5445,3170 5305,3170 cw(c5305,3185) 5290,3185 5290,3270 ccw(c5285,3270) 5285,3275 5260,3275 ccw(c5260,3270)
M1OUT2 on Bottom Layer "M1OUT2_L02_P026" (solid, pour order 26): 5205,3170 5220,3170 cw(c5220,3160) 5230,3160 5230,2990 cw(c5220,2990) 5220,2980 5055,2980 cw(c5055,2995) 5040,2995 5040,3260 cw(c5055,3260) 5055,3275 5180,3275 cw(c5180,3265) 5190,3265 5190,3185 ccw(c5205,3185)

## Keep-outs
Keep-Out Layer:
  the board outline again, w10

## Other copper
Top Layer:
  pour cut-out: 2154.61,3228.95 cw(c2135.06,3225.01) 2155,3225 ccw(c2175,3225) 2175,3205 2750,3205 ccw(c2750,3225) 2770,3225 2770,3300 ccw(c2755,3300) 2755,3315 2175,3315 ccw(c2175,3295) 2155,3295 2155,3228.98
  pour cut-out: 2020,2990 2750,2990 ccw(c2750,3010) 2770,3010 2770,3085 ccw(c2755,3085) 2755,3100 2020,3100 ccw(c2020,3077.98) 1997.98,3077.98 1997.98,3012.02 ccw(c2020,3012.02)
Bottom Layer:
  pour cut-out: 3405,2895 3690,2895 ccw(c3690,2915) 3710,2915 3710,2990 ccw(c3690,2990) 3690,3010 3595,3010 cw(c3595,3025) 3580,3025 3580,3175 ccw(c3560,3175) 3560,3195 3405,3195 ccw(c3405,3180) 3390,3180 3390,2910 ccw(c3405,2910)

## Silkscreen, mask and mechanical layers (free items; w line width, h text height)
Top Overlay:
  drawing of 8 lines, arcs and shapes, not listed
Bottom Overlay:
  drawing of 277 lines, arcs and shapes, not listed
  text "Kuronami" at 2635,2290 h78.74
BoardOutLine:
  the board outline again, w10